# EAGLE board Schematic (EAGLE 6.6.0)
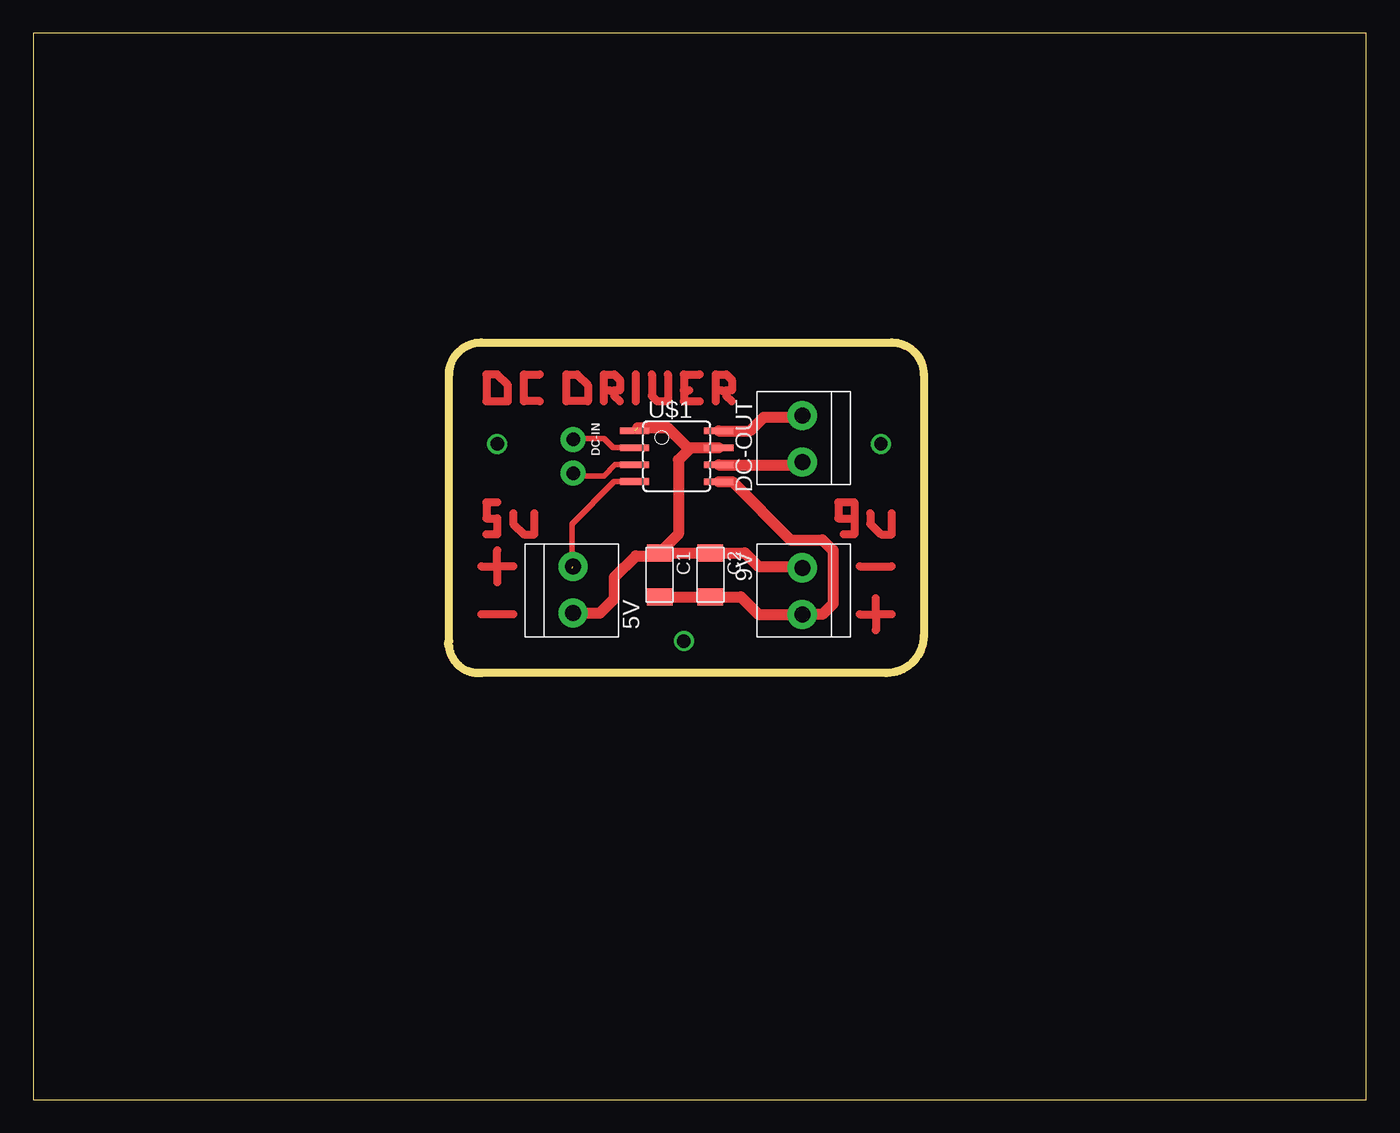
[diagram p0: board, top side]

Size 100 x 80 mm. Coordinates in mm from the lower left corner, seen from the top.
Outline: 0,0 100,0 100,80 0,80 0,0
Copper layers (1*16): Top 0.035mm / dielectric 1.5mm / Bottom 0.035mm
Design rules "default *": minimum track width 10mil, minimum drill 24mil, track to track 0.4mm, track to pad 0.4mm, pad to pad 0.4mm, via to via 0.4mm, smd to smd 0.4mm, copper to edge 40mil, drill to drill 8mil, minimum pad ring 10mil, minimum via ring 8mil, stop-mask expansion 4mil, vias tented up to drill 0mil, thermal gap 10mil
Milling: area 31.1,32 to 66.8,56.8

## Footprints (pad centres in the part's own frame; a part is rotated, then mirrored left to right if it is on the bottom)
ED555DS-2DS = drill 1.2 pad 2.184: 1 1.8,0; 2 -1.7,0
C1206FAB = smd 1.27 x 1.905: 1 -1.651,0; 2 1.651,0
1X02_NO_SILK = drill 1.016 pad 1.88: 1 0,0; 2 2.54,0
SOIC8 = smd 0.5 x 2.2: 1 -1.905,-3.154; 2 -0.645,-3.154; 3 0.625,-3.154; 4 1.895,-3.154; 5 1.905,3.154; 6 0.635,3.154; 7 -0.635,3.154; 8 -1.905,3.154

## Placement (x,y rotation side)
5V  TERM-1X02-FABLAB  [ED555DS-2DS]  40.5,38.3 270 top
9V  TERM-1X02-FABLAB  [ED555DS-2DS]  57.69,38.1 90 top
C1  10uf  [C1206FAB]  46.99,39.37 270 top
C2  1uf  [C1206FAB]  50.8,39.37 270 top
DC-IN  [1X02_NO_SILK]  40.5,49.53 270 top
DC-OUT  TERM-1X02-FABLAB  [ED555DS-2DS]  57.69,49.53 90 top
U$1  A4953  [SOIC8]  48.26,48.26 270 top

## Library data of the parts
5V 9V C1 C2 DC-OUT U$1 = fab
DC-IN = SparkFun-Connectors

## Nets
DC-IN-1: DC-IN.2 U$1.3
DC-IN-2: DC-IN.1 U$1.2
GND: 5V.1 9V.1 C1.1 C2.1 U$1.1 U$1.7
OUT1: DC-OUT.2 U$1.6
OUT2: DC-OUT.1 U$1.8
VCC: 5V.2 U$1.4
VDD: 9V.2 C1.2 C2.2 U$1.5

## Tracks (layer width: path | path; a pad name or v marks a point on that pad's centre or on a via)
DC-IN-1
  Top 0.406: U$1.3 43.63,47.63 42.8,46.8 40.69,46.8 DC-IN.2
DC-IN-2
  Top 0.406: U$1.2 43.49,48.91 42.8,49.6 40.57,49.6 DC-IN.1
GND  (1 unrouted)
  Top 0.813: 45.34,50.4 47.6,50.4 49.1,48.9 U$1.7 49.3,48.9 48.4,48 48.4,42.43 C1.1 | C1.1 C2.1 53.38,41.02 54.4,40 57.59,40 9V.1 | 5V.1 42.5,36.5 43.6,37.6 43.6,39.2 45.2,40.8 46.77,40.8 C1.1
N$1
  Top 0.61: 36,40 34.8,40 | 33.6,40 34.8,40 | 34.8,40 34.8,38.8 | 34.8,40 34.8,41.2
N$2
  Top 0.61: 36,36.4 33.6,36.4
N$3
  Top 0.61: 62,36.4 63.2,36.4 | 64.4,36.4 63.2,36.4 | 63.2,36.4 63.2,35.2 | 63.2,36.4 63.2,37.6
N$4
  Top 0.61: 62,40 64.4,40
N$5
  Top 0.61: 34,54.4 34,52.4 35.6,52.4 35.6,53.6 34.8,54.4 34,54.4
N$6
  Top 0.61: 38,52.4 36.8,52.4 36.8,54.4 38,54.4
N$7
  Top 0.61: 40,52.4 40,54.4 40.8,54.4 41.6,53.6 41.6,52.4 40,52.4
N$8
  Top 0.61: 42.8,52.4 42.8,54.4 43.6,54.4 44,54 44,53.2 43.6,53.2 | 43.2,53.2 43.6,53.2 | 43.6,53.2 43.6,52.8 44,52.4
N$9
  Top 0.61: 45.2,52.4 45.2,54.4
N$10
  Top 0.61: 36,44 36,43.2 36.8,42.4 37.6,42.4 37.6,44
N$11
  Top 0.61: 46.4,54.4 46.4,52.8 46.8,52.4 47.6,52.4 47.6,54.4
N$12
  Top 0.61: 61.6,43.6 60.4,43.6 60.4,44.8 61.6,44.8 61.6,43.6 | 61.6,43.6 61.6,42.4 60.8,42.4
N$13
  Top 0.61: 62.8,44 62.8,43.2 63.6,42.4 64.4,42.4 64.4,44
N$14
  Top 0.61: 50,54.4 48.8,54.4 48.8,53.2 | 48.8,53.2 48.8,52.4 50,52.4 | 48.8,53.2 49.2,53.2
N$15
  Top 0.61: 51.2,52.4 51.2,54.4 52,54.4 52.4,54 52.4,53.2 52,53.2 | 51.6,53.2 52,53.2 | 52,53.2 52,52.8 52.4,52.4
N$16
  Top 0.61: 34.8,44.8 34,44.8 34,43.6 34.8,43.6 34.8,42.4 34,42.4
N$17  (via drill 1)
  other vias: 34.8,49.2
N$18  (via drill 1)
  other vias: 63.6,49.2
N$19  (via drill 1)
  other vias: 48.8,34.4
OUT1
  Top 0.813: U$1.6 57.48,47.62 DC-OUT.2
OUT2
  Top 0.813: U$1.8 53.77,50.16 54.8,51.2 57.56,51.2 DC-OUT.1
VCC  (1 unrouted)
  Top 0.406: U$1.4 43.56,46.37 40.4,43.2 40.4,39.9
VDD
  Top 0.813: C1.2 C2.2 53.08,37.72 54.4,36.4 9V.2 59.2,36.4 60,37.2 60,41.2 59.2,42 56.8,42 52.45,46.35 U$1.5